# Altium PCB Safety_Lock.PcbDoc (part 2 of 2)
Units mil, origin at the board's own origin, x right, y up, seen from the top; angles counter-clockwise.
Board outline 3784.65 x 3766.54 mil, 2 copper layers (Top Layer, Bottom Layer), stack 50 mil thick; 87 components, 62 nets, 322 pads, 500 vias.
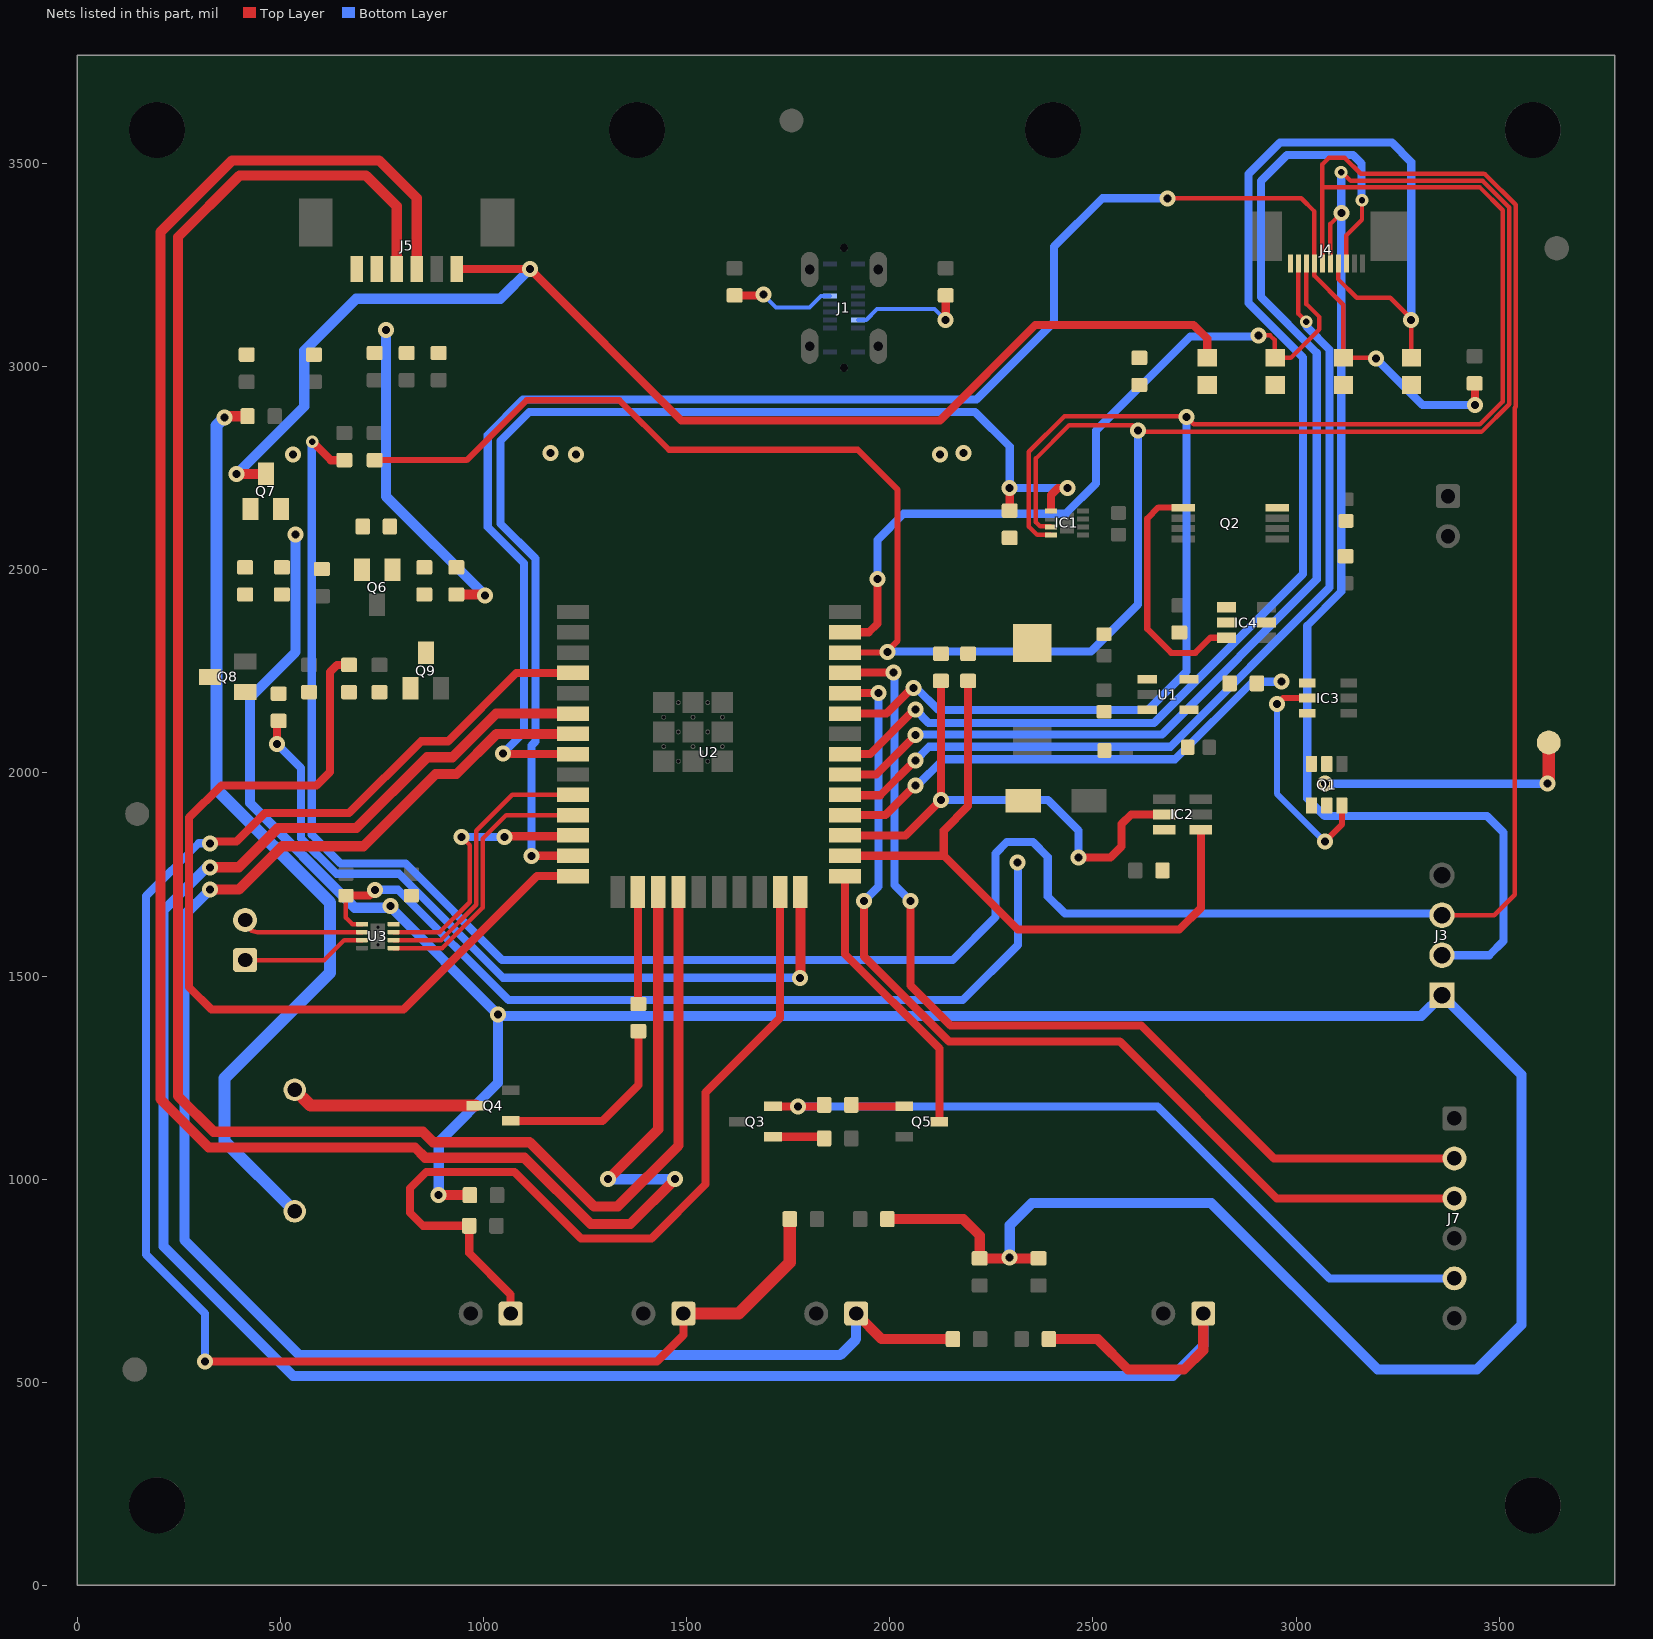
[diagram p2: the nets of this part, all layers, seen from the top]

## Via types
v1: diameter 23.62, hole 11.81, Top Layer to Bottom Layer, tented both sides, 394 vias
v2: diameter 39.37, hole 19.68, Top Layer to Bottom Layer, tented both sides, 100 vias
v3: diameter 31.5, hole 15.75, Top Layer to Bottom Layer, tented both sides, 6 vias

## Nets (pads, with @x,y where several pads share a name; then routed paths per layer and width w, separated by ;. In a path a pad name is that pad's centre, name@x,y a point inside that pad or via, vN(x,y) a via of type N, cw(c..) or ccw(c..) an arc to the next point about the centre after c; other vN are vias at no path point) (continued)
I2C_SCL: IC1.7 J3.2 J4.5 R13.2 U2.36 | length 8078.2
  Top Layer w11: IC1.7@2396.84,2605.32 2396.43,2605.72 2395.56,2606.59 2370.19,2606.59 2359.75,2617.03 2359.75,2773.88 2441.96,2856.09 2597.9,2856.09 v2(2611.22,2842.77) ; v2@2611.76,2844.04 2616.51,2839.28 3456.4,2839.28 3524.45,2907.33 3524.45,3391.88 3459.38,3456.94 3134.96,3456.94 3113.28,3478.63 v3(3111.04,3478.63) ; J4.5@3084.65,3253.74 3084.65,3351.16 v2(3111.44,3377.95)
  Top Layer w15: R13.2@732.28,2769.68 958.66,2769.68 1106.3,2917.32 1334.65,2917.32 1456.69,2795.28 1921.26,2795.28 2019.31,2697.22 2019.31,2325.72 1992.91,2299.32 1992.91,2296.06 U2.36@1889.76,2296.06
  Bottom Layer w20: v2(1993.9,2297.05) 1995.38,2298.53 2495.38,2298.53 2611.22,2414.37 v2(2611.22,2842.77) ; v3(3111.04,3478.63) 3111.24,3478.43 3111.24,3378.15 v2(3111.44,3377.95) 3111.44,2446.09 3027.56,2362.2 3027.56,1936.71 3070.57,1893.7 3470.12,1893.7 3510.79,1853.02 3510.79,1586.46 3475.52,1551.18 J3.2@3359.25,1551.18
I2C_SDA: IC1.8 J3.3 J4.6 R14.2 U2.33 | length 10989.4
  Top Layer w11: IC1.8@2396.84,2585.63 2362.99,2585.63 2342.28,2606.33 2342.28,2790.12 2430.12,2877.96 2728.52,2877.96 v2(2730.52,2875.96) 2748.21,2858.27 3452.76,2858.27 3508.45,2913.96 3508.45,3385.25 3452.76,3440.94 3066.92,3440.94 3064.96,3438.98 ; J4.6@3064.96,3253.74 3064.96,3438.98 ; J3.3@3359.25,1649.61 3488.19,1649.61 3538.65,1700.07 3538.65,2898.91 3540.45,2900.71 3540.45,3398.51 3466.01,3472.94 3464.06,3472.94 3462.6,3474.41 3159.45,3474.41 3120.18,3513.68 3080.41,3513.68 3064.96,3498.23 3064.96,3438.98
  Top Layer w20: v3(578.74,2814.96) 624.02,2769.68 R14.2@657.48,2769.68 ; U2.33@1889.76,2146.06 1991.8,2146.06 2058.76,2213.02 v2@2060.39,2211.39 ; v2(2059.05,2208.66) 2059.05,2210.06 v2@2060.39,2211.39 ; v2@2063.12,2208.66 2061.09,2210.69 v2@2060.39,2211.39
  Bottom Layer w20: v3(578.74,2814.96) 577.47,2813.69 577.47,1847.8 648.46,1776.81 808.81,1776.81 1046.05,1539.57 2154.94,1539.57 2260.45,1645.08 2260.45,1802.04 2287.96,1829.54 2352.47,1829.54 2389.01,1793.01 2389.01,1695.67 2431.13,1653.54 3355.32,1653.54 J3.3@3359.25,1649.61 ; v2(2059.05,2208.66) 2059.05,2216.86 2060.39,2218.19 v2@2066.93,2211.65 ; v2@2064.97,2209.7 2119.78,2154.9 2635.95,2154.9 2730.52,2249.46 2730.52,2872.25 v2@2732.28,2874.02
IO0: Q5.3 U2.25 | length 700.5
  Top Layer w20: U2.25@1889.76,1746.06 1889.76,1553.52 2122.05,1321.24 Q5.3@2122.05,1141.73
Keypad_EN: J4.8 R32.2 U2.37 | length 1920.4
  Top Layer w11: v2(2907.07,3076.79) 2936.12,3076.79 2947.08,3065.83 2947.08,3021.65 2987.44,3021.65 3057.55,3091.77 3057.55,3122.1 3025.59,3154.06 J4.8@3025.59,3253.74
  Top Layer w20: U2.37@1889.76,2346.06 1948.43,2346.06 1969.49,2367.13 v2(1969.49,2477.36)
  Bottom Layer w20: v2(1969.49,2477.36) 1969.49,2573.49 2033.8,2637.8 2433.07,2637.8 2507.87,2712.6 2507.87,2842.52 2739.62,3074.27 2904.55,3074.27 v2(2907.07,3076.79)
Keypad_int: J4.7 R10.1 R31.2 U2.8 | length 4230.1
  Top Layer w11: v2(2684.06,3414.37) 3012.8,3414.37 3045.28,3381.89 J4.7@3045.28,3253.74 3045.28,3223.37 3116.49,3152.15 R31.2@3116.49,3021.65 3194.88,3021.65 v2(3196.85,3019.68)
  Top Layer w20: v2(1047.88,2047.69) 1049.52,2046.06 U2.8@1220.47,2046.06 ; R10.1@3439.61,2958.66 3440.28,2958 3440.28,2906.41 v2(3440.94,2905.74)
  Bottom Layer w20: v2(1047.88,2047.69) 1047.88,2048.33 1099.71,2100.16 1099.71,2516.01 1010.43,2605.28 1010.43,2831.7 1097.39,2918.66 2213.93,2918.66 2404.66,3109.38 2404.66,3295.27 2523.75,3414.37 v2(2684.06,3414.37) ; v2(3196.85,3019.68) 3311.02,2905.51 3440.72,2905.51 v2(3440.94,2905.74)
Keypad_LED: J4.9 U2.29 | length 2234.2
  Top Layer w11: J4.9@3005.91,3253.74 3005.92,3129.8 3025.14,3110.57 v3(3025.14,3110.31)
  Top Layer w20: U2.29@1889.76,1946.06 1890.73,1945.1 1976.73,1945.1 2062.49,2030.86 v2(2062.99,2030.86)
  Bottom Layer w20: v2(2062.99,2030.86) 2096.59,2064.45 2690.83,2064.45 3082.57,2456.19 3082.57,3041.45 3025.34,3098.67 3025.34,3110.12 v3(3025.14,3110.31)
Keypad_OUT: J4.4 R30.2 U2.31 | length 3574.3
  Top Layer w11: J4.4@3104.33,3253.74 3104.33,3214.57 3149.61,3169.29 3232.28,3169.29 3283.92,3117.65 R30.2@3283.92,3021.65
  Top Layer w20: U2.31@1889.76,2046.06 1951.88,2046.06 2061.38,2155.56 v2(2062.99,2155.56)
  Bottom Layer w20: v2(2062.99,2155.56) 2095.48,2123.08 2650.81,2123.08 3017.36,2489.62 3017.36,3022.62 2883.32,3156.66 2883.32,3473.7 2960.8,3551.18 3236.22,3551.18 3283.46,3503.94 v2(3283.46,3114.17)
Keypad_RST: J4.3 U2.30 | length 2944.4
  Top Layer w11: J4.3@3124.02,3253.74 3124.02,3323.45 3162.4,3361.83 v3(3162.4,3409.7)
  Top Layer w20: U2.30@1889.76,1996.06 1966.85,1996.06 2062.99,2092.2 v2(2062.99,2093.21)
  Bottom Layer w20: v2(2062.99,2093.21) 2064.39,2094.6 2669.77,2094.6 3050.87,2475.7 3050.87,3034.04 2913.39,3171.52 2913.39,3456.77 2977.8,3521.18 3140.23,3521.18 3161.42,3500 3161.42,3410.68 v3(3162.4,3409.7)
LimClose: J8.1 R25.1 U2.6 | length 5357.3
  Top Layer w25: v2(326.77,1767.72) 397.64,1767.72 494.5,1864.58 687.46,1864.58 861.37,2038.49 923.84,2038.49 1031.41,2146.06 U2.6@1220.47,2146.06 ; R25.1@2391.73,606.3 2511.81,606.3 2586.61,531.5 2724.41,531.5 2771.65,578.74 J8.1@2771.65,669.29
  Bottom Layer w25: v2(326.77,1767.72) 318.9,1767.72 212.6,1661.42 212.6,834.65 531.5,515.75 2696.85,515.75 2771.65,590.55 J8.1@2771.65,669.29
LimOpen: J9.1 R26.1 U2.7 | length 4055.4
  Top Layer w25: v2(326.77,1712.6) 397.64,1712.6 504.39,1819.35 704.86,1819.35 882.71,1997.21 933.55,1997.21 1032.41,2096.06 U2.7@1220.47,2096.06 ; J9.1@1917.32,669.29 1980.32,606.3 R26.1@2155.51,606.3
  Bottom Layer w25: v2(326.77,1712.6) 263.78,1649.61 263.78,850.39 547.24,566.93 1877.95,566.93 1917.32,606.3 J9.1@1917.32,669.29
NetC2_1: C2.1 C3.1 C9.1 D1.1 IC3.6 Q1.1 Q1.2 Q1.5 Q1.6 TB2.1 U1.1 U1.3 U3.1 | length 2800.3
  Top Layer w11: C9.1@672.43,1708.85 C9.1@661.42,1697.83 661.42,1643.7 677.17,1627.95 U3.1@701.38,1627.95 ; v2@733.31,1708.85 v2(733.31,1712.13)
  Top Layer w20: C9.1@661.42,1697.83 661.96,1698.37 719.55,1698.37 v2(733.31,1712.13)
  Top Layer w30: v2(3619.09,1973.43) 3622.05,1976.38 TB2.1@3622.05,2074.8
  Bottom Layer w20: v2(733.31,1712.13) 733.67,1712.49 789.86,1712.49 1061.65,1440.69 2179.69,1440.69 2315.39,1576.39 v2@2315.39,1779.1 ; v2(3071.85,1973.43) 3617.13,1973.43 v2@3618.11,1972.44
  other v2: 2314.96,1779.53
NetC6_1: C6.1 U1.4
NetC7_1: C7.1 IC4.5 R8.1
NetIC1_5: IC1.5 R3.1 U2.13 | length 2864.9
  Top Layer w20: v2(1118.11,1795.28) 1118.9,1796.06 U2.13@1220.47,1796.06 ; R3.1@2295.28,2645.61 v2(2295.28,2700.79) ; IC1.5@2396.84,2647.91 2396.84,2683.57 2414.05,2700.79 v2(2437.01,2700.79)
  Bottom Layer w20: v2(1118.11,1795.28) 1118.11,2067.47 1127.68,2077.04 1127.68,2527.33 1041.76,2613.25 1041.76,2817.43 1112.72,2888.39 2210.04,2888.39 2295.28,2803.15 v2(2295.28,2700.79) v2(2437.01,2700.79)
NetIC2_1: IC2.1 R4.2 U2.26 | length 1621.4
  Top Layer w20: U2.26@1889.76,1796.06 2133.07,1796.06 ; R4.2@2192.91,2226.38 2192.91,1918.11 2133.07,1858.27 2133.07,1796.06 ; IC2.1@2765.75,1860.24 2765.75,1667.32 2712.6,1614.17 2314.96,1614.17 2133.07,1796.06
NetIC2_5: IC2.5 R5.2 U2.27 | length 1289
  Top Layer w20: U2.27@1889.76,1846.06 2038.98,1846.06 v2(2125.98,1933.07) R5.2@2125.98,2226.38 ; v2(2464.57,1791.34) 2543.31,1791.34 2570.87,1818.9 2570.87,1874.02 2594.49,1897.64 IC2.5@2675.2,1897.64
  Bottom Layer w20: v2(2125.98,1933.07) 2389.76,1933.07 2464.57,1858.27 v2(2464.57,1791.34)
NetIC2_6: IC2.6 R6.1
NetIC3_4: IC3.4 R7.1 U2.28 | length 1210.8
  Top Layer w20: U2.28@1889.76,1896.06 1989.87,1896.06 2062.31,1968.5 v2(2062.99,1968.5)
  Bottom Layer w20: v2(2062.99,1968.5) 2066.93,1968.5 2131.89,2033.47 2702.45,2033.47 2893.39,2224.41 v2(2964.57,2224.41)
NetIC3_5: IC3.5 Q1.3 | length 574.9
  Top Layer w15: v2(2952.76,2169.29) 2967.45,2183.98 IC3.5@3027.56,2183.98 ; v2(3070.87,1830.71) 3112.88,1872.72 Q1.3@3112.88,1919.83
  Bottom Layer w15: v2(2952.76,2169.29) 2952.76,1948.82 v2(3070.87,1830.71)
NetIC4_1: IC4.1 Q2.4
NetIC4_2: IC4.2 R9.1
NetIC4_3: IC4.3 Q2.5 | length 607.4
  Top Layer w15: Q2.5@2722.91,2652.56 2721.93,2653.54 2661.42,2653.54 2633.86,2625.98 2633.86,2354.33 2692.91,2295.28 2751.97,2295.28 2789.37,2332.68 IC4.3@2828.74,2332.68
NetJ1_A5: J1.A5 R1.2 | length 299.9
  Top Layer w20: v2(2137.8,3114.17) R1.2@2137.8,3175.2
  Bottom Layer w10: J1.A5@1921.38,3115.08 1942.15,3115.08 1968.8,3141.73 2110.24,3141.73 v2@2136.89,3115.08
  Bottom Layer w15: v2@2136.89,3115.08 v2(2137.8,3114.17)
NetJ1_B5: J1.B5 R2.1 | length 260.8
  Top Layer w20: R2.1@1618.11,3175.2 1687.01,3175.2 v2(1688.98,3177.17)
  Bottom Layer w10: v2(1688.98,3177.17) 1692.01,3174.13 1720.47,3145.67 1802.76,3145.67 1831.23,3174.13 J1.B5@1853.27,3174.13
NetJ4_10: J4.10 R29.1 R30.1 R31.1 R32.1 R33.2
NetJ5_1: J5.1 Q7.3 R33.1 | length 3250.8
  Top Layer w20: J5.1@934.06,3240.16 v2(1114.34,3240.16) 1486.72,2867.78 2123.68,2867.78 2358.27,3102.36 2748.03,3102.36 2781.61,3068.78 R33.1@2781.61,3021.65
  Top Layer w25: v2(392.55,2735.54) 463.89,2735.54 Q7.3@464.57,2736.22
  Bottom Layer w25: v2(392.55,2735.54) 404.83,2735.54 405.51,2736.22 405.51,2748.5 559.06,2902.04 559.06,3039.37 686.65,3166.96 1041.14,3166.96 v2(1114.34,3240.16)
NetJ5_5: J5.5 R15.1 R16.1 R17.1 R40.1 | length 826.3
  Top Layer w25: R40.1@933.07,2438.98 1001.97,2438.98 v2(1003.94,2437.01)
  Bottom Layer w25: v2(759.84,3090.55) 759.84,2681.1 v2(1003.94,2437.01)
NetJ6_1: J6.1 U3.3 | length 308.4
  Top Layer w11: J6.1@413.39,1539.37 608.32,1539.37 657.53,1588.58 U3.3@701.38,1588.58
NetJ6_2: J6.2 U3.2 | length 304.8
  Top Layer w11: J6.2@413.39,1637.8 ccw(c442.91,1637.8) 442.91,1608.27 U3.2@701.38,1608.27
NetJ10_1: J10.1 R18.1 U2.4 | length 4162.5
  Top Layer w20: v2(314.96,551.18) 1427.2,551.18 1492.13,616.1 J10.1@1492.13,669.29 ; v2(326.77,1826.77) 330.71,1830.71 392.28,1830.71 462.52,1900.94 669.36,1900.94 846.16,2077.74 912.39,2077.74 1080.71,2246.06 U2.4@1220.47,2246.06
  Top Layer w30: J10.1@1492.13,669.29 1628.48,669.29 1753.94,794.75 R18.1@1753.94,901.57
  Bottom Layer w20: v2(314.96,551.18) 314.96,669.29 169.29,814.96 169.29,1696.85 299.21,1826.77 v2(326.77,1826.77)
NetJ11_1: J11.1 R43.1 U2.23 | length 2140.3
  Top Layer w20: J11.1@1066.93,669.29 1066.93,716.53 965.01,818.46 R43.1@965.01,885.33 850.89,885.33 818.9,917.32 818.9,977.64 859.04,1017.78 1076.7,1017.78 1240.16,854.33 1413.39,854.33 1546.65,987.6 1546.65,1213.45 1730.12,1396.91 U2.23@1730.12,1706.69
NetLS1_N: LS1.N Q4.3 | length 461.1
  Top Layer w30: LS1.N@535.37,1220.06 574.33,1181.1 Q4.3@980.31,1181.1
NetLS1_P: LS1.P R24.2 | length 2314.8
  Top Layer w25: v2(363.19,2875) 366.14,2877.95 R24.2@419.29,2877.95
  Bottom Layer w30: v2(363.19,2875) 342.52,2854.33 342.52,1960.63 622.05,1681.1 622.05,1507.87 362.72,1248.55 362.72,1093.5 LS1.P@535.37,920.85
NetQ3_1: Q3.1 R21.2 | length 127.6
  Top Layer w20: Q3.1@1712.6,1104.33 1834.65,1104.33 R21.2@1838.58,1100.39
NetQ4_1: Q4.1 R22.2 | length 483.9
  Top Layer w20: Q4.1@1066.93,1143.7 1067.7,1142.93 1292.54,1142.93 1381.17,1231.56 R22.2@1381.17,1364.17
NetQ5_1: Q5.1 R23.2 | length 131.6
  Top Layer w20: R23.2@1905.51,1183.07 1909.45,1179.13 Q5.1@2035.43,1179.13
NetQ6_1: Q6.1 R34.2 R38.1 R40.2
NetQ7_1: Q7.1 R36.2
NetQ8_1: Q8.1 R37.2 R39.2
NetQ8_3: Q8.3 R35.1 R36.1
NetQ9_1: Q9.1 R41.1 R42.2
NetQ9_3: Q9.3 R38.2
NetR22_1: R22.1 U2.16 | length 276
  Top Layer w20: U2.16@1380.12,1706.69 1380.12,1432.15 R22.1@1381.17,1431.1
NetR37_1: R37.1 U2.24 | length 1897.2
  Top Layer w20: v2(492.13,2070.87) 492.13,2124.02 R37.1@496.06,2127.95
  Top Layer w25: v2(1779.53,1495.75) 1779.53,1502.24 1780.43,1503.15 1780.43,1706.38 U2.24@1780.12,1706.69
  Bottom Layer w20: v2(492.13,2070.87) 551.18,2011.81 551.18,1838.74 638.11,1751.81 792.05,1751.81 1048.11,1495.75 v2(1779.53,1495.75)
NetR42_1: R42.1 U2.14 | length 2215.1
  Top Layer w20: R42.1@669.29,2265.75 639.13,2265.75 622.05,2248.67 622.05,2001.99 589.02,1968.97 354.79,1968.97 275.59,1889.76 275.59,1472.44 330.71,1417.32 803,1417.32 1131.74,1746.06 U2.14@1220.47,1746.06
NetU2_10: U2.10 U3.6 | length 696.5
  Top Layer w11: U3.6@778.94,1588.58 895.55,1588.58 982.06,1675.09 982.06,1857.61 1070.52,1946.06 U2.10@1220.47,1946.06
NetU2_11: U2.11 U3.5 | length 676.6
  Top Layer w11: U3.5@778.94,1568.9 898.5,1568.9 998.06,1668.46 998.06,1838.45 1055.68,1896.06 U2.11@1220.47,1896.06
NetU2_12: U2.12 U3.7 | length 660.1
  Top Layer w11: U3.7@778.94,1608.27 892.61,1608.27 966.06,1681.72 966.06,1822.42 v2(945.97,1842.52)
  Top Layer w20: v2(1051.54,1842.16) 1053.49,1844.11 1218.52,1844.11 U2.12@1220.47,1846.06
  Bottom Layer w20: v2@948.8,1842.5 1051.18,1842.5 v2(1051.54,1842.16)
RTS: J7.5 Q3.2 R23.1 | length 1919.1
  Top Layer w20: Q3.2@1712.6,1179.13 v2(1773.62,1179.13) 1834.65,1179.13 R23.1@1838.58,1183.07
  Bottom Layer w20: v2(1773.62,1179.13) 2659.45,1179.13 3082.68,755.9 J7.5@3389.76,755.9
RX0: J7.3 U2.34 | length 2445.9
  Top Layer w20: U2.34@1889.76,2196.06 1890.55,2196.85 v2(1972.44,2196.85) ; v2(1937.01,1685.04) 1937.01,1547.86 2145.78,1339.09 2566.28,1339.09 2952.62,952.75 J7.3@3389.76,952.75
  Bottom Layer w20: v2(1937.01,1685.04) 1972.44,1720.47 v2(1972.44,2196.85)
RX1: J5.3 U2.17 | length 5408.9
  Top Layer w25: J5.3@835.63,3240.16 835.63,3415.07 743.08,3507.62 381.33,3507.62 204.72,3331.02 204.72,1197.33 323.99,1078.07 831.38,1078.07 856.53,1052.92 1100.63,1052.92 1263.78,889.76 1361.57,889.76 v2(1471.81,1000) ; v2(1307.09,1000) 1430.12,1123.03 U2.17@1430.12,1706.69
  Bottom Layer w25: v2(1307.09,1000) v2@1467.23,1000
TX0: J7.2 U2.35 | length 2425.4
  Top Layer w20: U2.35@1889.76,2246.06 1890.65,2246.95 2010.05,2246.95 2009.69,2247.31 v2(2009.69,2247.68) ; v2(2051.18,1685.04) 2051.18,1476.68 2149.7,1378.15 2618.99,1378.15 2945.96,1051.18 J7.2@3389.76,1051.18
  Bottom Layer w20: v2(2009.69,2247.68) 2011.08,2247.68 2012.13,2246.63 2012.13,1724.09 v2(2051.18,1685.04)
TX1: J5.4 U2.18 | length 4931.6
  Top Layer w25: J5.4@786.42,3240.16 786.42,3394.69 711.1,3470 399.13,3470 248.09,3318.96 248.09,1204.51 335.99,1116.61 850.51,1116.61 876.07,1091.06 1113.67,1091.06 1271.65,933.07 1330.71,933.07 1480.12,1082.48 U2.18@1480.12,1706.69
VDD: C4.1 C5.1 C8.1 J3.1 J5.6 Q6.2 Q7.2 R3.2 R4.1 R5.1 R7.2 R11.2 R12.2 R19.1 R20.1 R27.1 R28.1 R29.2 R34.1 R35.2 R44.1 U1.5 U3.8 | length 7374.2
  Top Layer w25: v2(889.76,960.63) R44.1@966.54,960.63 ; R20.1@1994.09,901.57 2181.1,901.57 2221.39,861.28 R27.1@2221.39,805.12 ; R27.1@2232.28,805.12 R28.1@2366.14,805.12
  Bottom Layer w25: v2(537.43,2586.61) 537.43,2297.28 425.2,2185.04 425.2,1925.83 683.11,1667.92 771.74,1667.92 771.74,1672.3 v2(771.23,1672.8) 771.23,1669.72 v2(1035.43,1405.51) ; v2(889.76,960.63) 889.76,1091.04 1035.43,1236.71 v2(1035.43,1405.51) ; v2(2295.28,807.09) 2295.28,886.87 2349.35,940.94 2791.34,940.94 3200.79,531.5 3444.88,531.5 3555.12,641.73 3555.12,1256.89 J3.1@3359.25,1452.76 3308.49,1401.99 1038.95,1401.99 v2(1035.43,1405.51)
  other v2: 531.5,2783.46 1228.35,2783.46 2123.89,2783.46 1165.35,2787.4 2181.1,2787.4
pads on no net: FID1.1 FID2.1 IC4.4 J1. J1.A6 J1.A7 J1.A8 J1.B6 J1.B7 J1.B8 Q2.1 Q2.8 U2.5 U2.19 U2.20 U2.21 U2.22 U2.32 U3.9 U3.9_1 U3.9_2

## Polygon pours and split planes (outlines as drawn)
GND on Top Layer "GND" (solid, remove dead copper, pour order 48): 0,0 0,3766.54 3784.65,3766.54 3784.64,0
NetC2_1 on Top Layer "NetC2_1" (solid, remove dead copper, pour order 18): 2263.62,1779.69 2291.34,1751.97 2342.52,1751.97 2370.08,1779.53 2370.08,1850.39 2406.34,1886.65 2409.45,1886.65 2409.45,1976.38 2842.52,1976.38 2928.05,1890.85 3091.9,1890.85 3091.9,2044.2 3058.23,2077.87 3058.23,2163.16 2997.8,2163.16 2842.52,2007.87 2574.8,2007.87 2555.25,2027.42 2555.25,2132.33 2557.61,2134.68 2667.48,2134.68 2667.48,2173.37 2600.24,2173.37 2600.24,2212.6 2667.48,2212.6 2667.48,2251.14 2601.53,2251.14 2570.87,2220.47 2570.87,2188.98 2555.25,2173.37 2502.82,2173.37 2499.49,2170.04 2499.49,2105.79 2389.76,1996.06 2295.94,1996.06 2263.62,1963.74
3.3V_MCU on Top Layer "3.3V_MCU" (solid, pour order 47): 458.29,2900.69 425.07,2933.91 391.85,2933.91 391.84,2933.92 391.84,2986.4 391.86,2986.41 749.06,2986.41 752.26,2983.21 752.26,2818.58 640.04,2818.59 582.38,2876.25 532.28,2876.25 505.14,2849.1 467.3,2849.1 458.29,2858.12
VDD on Top Layer "Top Layer-VDD" (solid, remove dead copper, pour order 45): 1263.78,2751.97 1263.78,2818.9 1149.61,2818.9 1043.31,2712.6 605.67,2712.6 584.65,2712.6 551.18,2746.06 551.18,2787.4 515.75,2822.83 358.89,2822.83 326.77,2854.95 326.77,2964.57 370.08,3007.87 393.7,3007.87 606.3,3007.87 606.3,3051.18 703.74,3148.62 703.74,3271.66 551.18,3271.66 291.34,3011.81 291.34,2838.58 334.65,2795.28 500,2795.28 523.62,2771.65 523.62,2704.72 500.31,2681.41 473.97,2681.41 473.97,2492.62 484.37,2482.21 529.6,2482.21 539.7,2472.11 730.65,2472.11 731.5,2653.54 1094.49,2653.54 1192.91,2751.97
NetJ6_2 on Top Layer "GND" (solid, remove dead copper, pour order 8): 406.79,1603.09 cw(c406.79,1639.8) 370.08,1639.77 cw(c407.27,1639.95) 407.12,1677.17 602.86,1677.17 667.83,1612.2 667.79,1603.09
NetJ6_1 on Top Layer "GND" (solid, remove dead copper, pour order 6): 669.18,1594.09 405.11,1594.09 ccw(c405.11,1551.18) 362.2,1551.18 362.2,1535.43 ccw(c405.51,1535.43) 405.51,1492.13 578.74,1492.13 669.29,1582.68
I2C_SDA on Top Layer "I2C_SDA" (solid, pour order 9): 3062.99,3413.39 cw(c3086.61,3413.39) 3086.61,3437.01 3094.69,3437.01 3094.69,3446.6 3085,3446.6 cw(c3085,3468.61) 3062.99,3468.61
NetJ4_10 on Top Layer "NetJ3_10" (solid, remove dead copper, pour order 15): 2580.55,2923.07 3317.55,2923.07 3317.55,2985 2854.33,2985 2854.33,3086.61 2996.06,3228.35 2996.06,3287.4 2970.32,3287.4 2970.32,3238.03 2818.9,3086.61 2818.9,2985 2580.55,2985
3.3V_MCU on Top Layer "GND" (solid, remove dead copper, pour order 12): 767.87,2450.94 646.95,2450.94 635.98,2461.91 568.74,2461.91 568.74,2403.38 680.95,2403.38 708.5,2375.83 767.87,2375.83
no net on Top Layer "GND" (solid, remove dead copper, pour order 51): 3098.43,1940.94 3098.43,1889.76 3090.55,1881.89 3018.93,1881.89 3009.97,1890.85 3009.97,2068.77 2988.19,2090.55 2988.19,2153.54 2997.8,2163.16 3058.23,2163.16 3058.23,2197.07
NetJ5_5 on Top Layer "NetJ4_5" (solid, pour order 39): 712.16,3015.05 712.16,3262.46 721.39,3271.68 755.91,3271.68 755.91,3141.73 830.71,3066.93 918.61,3066.93 918.61,3014.55
VDD on Top Layer "VDD" (solid, remove dead copper, pour order 13): 2102.36,2751.97 2102.36,2818.9 2216.54,2818.9 2450.95,3053.31 2647.8,3053.31 2647.8,2995.2 2487.32,2995.2 2232.28,2740.16 2232.28,2631.74 2258.47,2605.56 2316.16,2605.56 2325.24,2596.47 2325.24,2560.88 2464.86,2421.26 2539.37,2421.26 2688.98,2271.65 2833.2,2271.65 2863.49,2241.36 2863.49,2199.59 2858.72,2194.81 2812.92,2194.81 2798.25,2209.49 2692.91,2209.49 2692.91,2228.8 2602.95,2318.76 2502.82,2318.76 2463.37,2318.76 2407.83,2263.23 2108.3,2263.23 2097.14,2274.39 2097.14,2534.14 2173.23,2610.24 2173.23,2724.41 2145.67,2751.97
NetIC2_6 on Top Layer "GND" (solid, remove dead copper, pour order 11): 2633.86,1875.83 2712.76,1875.83 2712.76,1799.37 2712.76,1739.86 2702.77,1729.87 2657.97,1729.87 2647.57,1740.28 2647.57,1785.5 2633.86,1799.21
+5V_USB1 on Top Layer "+5V_USB1" (solid, remove dead copper, pour order 17): 2421.05,1966.18 2703.42,1966.18 2712.76,1956.85 2712.76,1913.23 2558.23,1913.23 2531.65,1886.65 2436.18,1886.65 2421.26,1901.57
NetIC3_4 on Top Layer "NetIC3_4" (solid, remove dead copper, pour order 19): 2878.3,2243.81 3050.95,2243.81 3060.83,2233.93 3060.83,2213 3054.31,2206.48 2938.9,2206.48 2922.92,2190.5 2884.93,2190.5 2878.3,2197.14
NetIC4_1 on Top Layer "NetIC4_1" (solid, remove dead copper, pour order 21): 2862.36,2394.88 2862.36,2589.83 2914.26,2641.73 2987.03,2641.73 2993.29,2647.99 2993.29,2671.42 2891.89,2671.42 2795.12,2574.65 2795.12,2394.88
B+ on Top Layer "B+" (solid, remove dead copper, pour order 22): 2929.13,1870.08 2842.36,1956.85 2728.19,1956.85 2728.19,1913.23 2846.61,1913.23 2889.76,1870.08 3000,1759.84 3165.35,1759.84 3208.66,1803.15 3208.66,2007.87 3437.01,2236.22 3437.01,2598.42 3472.44,2633.86 3472.44,2738.54 3411.77,2799.21 2665.35,2799.21 2500,2633.86 2460.63,2633.86 2458.02,2631.24 2458.02,2598.95 2459.84,2597.12 2518.38,2597.12 2535.43,2614.17 2582.68,2614.17 2712.6,2744.09 3413.73,2744.09 3438.42,2719.4 3438.42,2643.15 3421.26,2625.98 3322.83,2625.98 3303.15,2606.3 3303.15,2559.06 3240.16,2496.06 3106.3,2496.06 3093.2,2482.96 3093.2,2447.62 3102.28,2438.54 3347.99,2438.54 3347.99,2277.12 3236.22,2165.35 3234.17,2167.41 3099.25,2167.41 3099.25,2125.76 3094.18,2120.68 3094.18,1994.73 3108.6,1980.31 3149.61,1980.31 3165.35,1964.57 3165.35,1814.96 3145.67,1795.28 3003.94,1795.28
B- on Top Layer "B-" (solid, remove dead copper, pour order 24): 3305.44,2699.14 3334.65,2728.35 3413.39,2728.35 3421.26,2720.47 3421.26,2648.37 3414.2,2641.3 3160.42,2641.3 3148.74,2652.98 3096.6,2652.98 3019.69,2576.06 3019.69,2458 2954.17,2392.49 2893.54,2392.49 2893.54,2430.28 2908.15,2444.88 2937.01,2444.88 2992.13,2500 2992.13,2590.55 2919.77,2590.55 2919.77,2637.8 3046.07,2637.8 3107.41,2699.14
NetC7_1 on Top Layer "NetC7_1" (solid, remove dead copper, pour order 25): 3078.74,2485.58 3099.75,2506.59 3142.93,2506.59 3152.01,2515.66 3152.01,2638.22 3146.59,2643.65 3100.64,2643.65 3047.24,2590.25 3047.24,2471.14 2960.79,2384.68 2893.54,2384.68 2893.54,2347.28 2961.46,2347.28 3078.74,2464.57
NetIC4_2 on Top Layer "NetIC4_2" (solid, remove dead copper, pour order 26): 2862.36,2385.83 2862.36,2354.49 2769.16,2354.33 2733.48,2318.66 2691.71,2318.66 2683.75,2326.62 2683.75,2364.45 2692.83,2373.53 2783.97,2373.53 2796.26,2385.83
NetC6_1 on Top Layer "NetC6_1" (solid, remove dead copper, pour order 27): 2702.6,2176.34 2769.84,2176.34 2769.84,2134.68 2756.04,2120.88 2756.04,2038.25 2710.49,2038.25 2702.6,2046.14 2702.6,2087.8
VDD on Top Layer "VDD" (solid, remove dead copper, pour order 28): 763.17,1642.34 763.17,1637.01 763.14,1620.71 800.62,1620.71 850.71,1670.8 850.71,1715.92 841.79,1724.84 783.9,1724.84 740.16,1681.1 740.16,1665.35
NetQ9_3 on Top Layer "NetQ6_3" (solid, remove dead copper, pour order 30): 822.86,2456.62 830.8,2464.57 876.51,2464.57 883.18,2457.89 883.18,2337.61 893.7,2327.09 893.7,2257.72 822.77,2257.72
NetQ9_1 on Top Layer "NetQ6_1" (solid, remove dead copper, pour order 31): 645.67,2225.7 770.66,2225.7 791.18,2246.22 850.55,2246.22 850.55,2171.1 645.67,2171.1
NetQ8_1 on Top Layer "NetQ5_1" (solid, remove dead copper, pour order 32): 375.83,2228.5 598.88,2228.5 598.88,2175.13 456.94,2175.13 450.94,2169.13 375.83,2169.13
NetQ8_3 on Top Layer "NetQ5_3" (solid, remove dead copper, pour order 33): 364.33,2206.53 364.33,2333.03 446.59,2415.29 529.6,2415.29 529.6,2457.15 519.92,2466.83 393.48,2466.83 289.21,2362.57 289.21,2206.53
NetQ6_1 on Top Layer "NetQ3_1" (solid, pour order 34): 744.15,2636.9 744.15,2478.65 756.54,2466.26 820.68,2466.26 833.44,2479.03 949.45,2479.03 963.04,2492.62 963.04,2545.7 943.64,2565.09 868.37,2565.09 830.73,2602.73 830.73,2637.42
NetQ7_1 on Top Layer "NetQ4_1" (solid, pour order 44): 450.77,2681.03 458.24,2673.56 458.24,2499.72 439.56,2481.05 391.46,2481.05 377.81,2494.7 377.81,2675.57 383.59,2681.34
GND on Bottom Layer "GND" (solid, remove dead copper, pour order 43): 0,0 0,3766.54 3784.65,3766.54 3784.64,0
+5V_USB1 on Bottom Layer "+5V_USB1" (solid, pour order 38): 1811.02,3133.86 cw(c1811.02,3137.8) 1807.09,3137.8 1807.09,3161.42 1828.3,3182.64 1940.94,3182.64 1940.94,3205.06 1833.33,3205.06 1819.34,3191.08 1765.62,3191.08 1755.91,3200.79 1755.91,3279.53 1681.1,3354.33 1511.81,3354.33 1456.69,3299.21 1456.69,3125.98 1480.31,3102.36 1527.56,3055.12 1614.17,3055.12 1657.48,3098.43 1818.9,3098.43 1830.71,3086.61 1940.94,3086.61 1940.94,3102.36 1834.65,3102.36 1828.82,3108.19 1828.82,3116.06
+5V_USB1 on Bottom Layer "+5V_USB1" (solid, pour order 29): 1968.59,3133.86 1968.59,3157.4 ccw(c1964.57,3157.4) 1964.57,3161.42 1943.35,3182.64 1830.79,3182.64 1830.79,3205.06 1938.4,3205.06 1952.39,3191.08 2006.12,3191.08 2015.83,3200.79 2015.83,3279.53 2090.63,3354.33 2259.92,3354.33 2315.04,3299.21 2315.04,3125.98 2291.42,3102.36 2228.43,3039.37 2098.43,3039.37 2039.37,3098.43 1952.84,3098.43 1941.03,3086.61 1830.79,3086.61 1830.79,3102.36 1937.09,3102.36
VDD on Bottom Layer "VDD" (solid, pour order 23): 1129.92,2818.9 1129.92,2751.97 2216.54,2751.97 2216.54,2818.9

## Silkscreen, mask and mechanical layers (free items; w line width, h text height)
Top Overlay:
  lines w5: 255.91,1326.77 255.91,1326.77 ; 255.91,1326.77 255.91,1866.14 984.25,1866.14 984.25,1326.77 255.91,1326.77 ; 228.35,460.63 228.35,3498.94 3543.31,3498.94 3543.31,460.63 228.35,460.63 ; 255.91,1911.13 984.25,1911.13 984.25,2795.28 984.25,2834.65 1417.32,2834.65 1417.32,3464.57 255.91,3464.57 255.91,2795.28 255.91,1911.13 ; 1456.69,2834.65 1456.69,3464.57 2362.2,3464.57 2362.2,2834.65 1456.69,2834.65 ; 2070.87,1318.9 2070.87,2795.28 2086.61,2795.28 3503.94,2795.28 3503.94,1318.9 2070.87,1318.9 ; 2401.57,2834.65 3503.94,2834.65 3503.94,3464.57 2401.57,3464.57 2401.57,2834.65
  text "Finger-Print" at 466.69,3545.74 h60
  text "Touch Sensor" at 2702.91,3545.74 h60
  text "-" at 3316.77,2698.97 h40 r180
  text "+" at 3323.44,2565.12 h40 r90
  text "Battery" at 3635.36,2439.13 h60 r90
  text "GND" at 3128.48,1726.54 h40
  text "SDA" at 3128.48,1633.87 h40
  text "SCL" at 3128.48,1539.39 h40
  text "I2C" at 3655.35,1525.75 h60 r90
  text "VDD" at 3128.48,1437.02 h40
  text "Motor" at 178.98,1435.2 h60 r90
  text "DTR" at 3076.33,1129.94 h40
  text "TX0" at 3076.33,1029.15 h40
  text "RX0" at 3076.33,928.36 h40
  text "3.3_MCU" at 2923.05,831.63 h40
  text "TTL" at 3655.35,817.09 h60 r90
  text "GND" at 2604.49,734.41 h40
  text "GND" at 1746.59,728.36 h40
  text "RTS" at 3076.33,726.79 h40
  text "GND" at 914.26,722.71 h40
  text "GND" at 1321.02,722.6 h40
  text "GND" at 3076.33,626 h40
  text "Button" at 860.39,340.71 h60
  text "Door" at 1352.52,340.71 h60
  text "Lim Open" at 1683.23,341.02 h60
  text "Lim Close" at 2513.94,340.71 h60
Board:
  the board outline again, w10

## Text inside footprints (layer, text, board x,y; h text height)
U2: Top Overlay "ANTENNA" at 1318.9,2543.31 h70